# Altium PCB CartSimple.PCBDOC
Units mm, origin at the board's own origin, x right, y up, seen from the top; angles counter-clockwise.
Board outline 50 x 50 mm, 4 copper layers (Top Layer, Internal Plane 1, Internal Plane 2, Bottom Layer); 24 components, 25 nets, 103 pads, 0 vias.
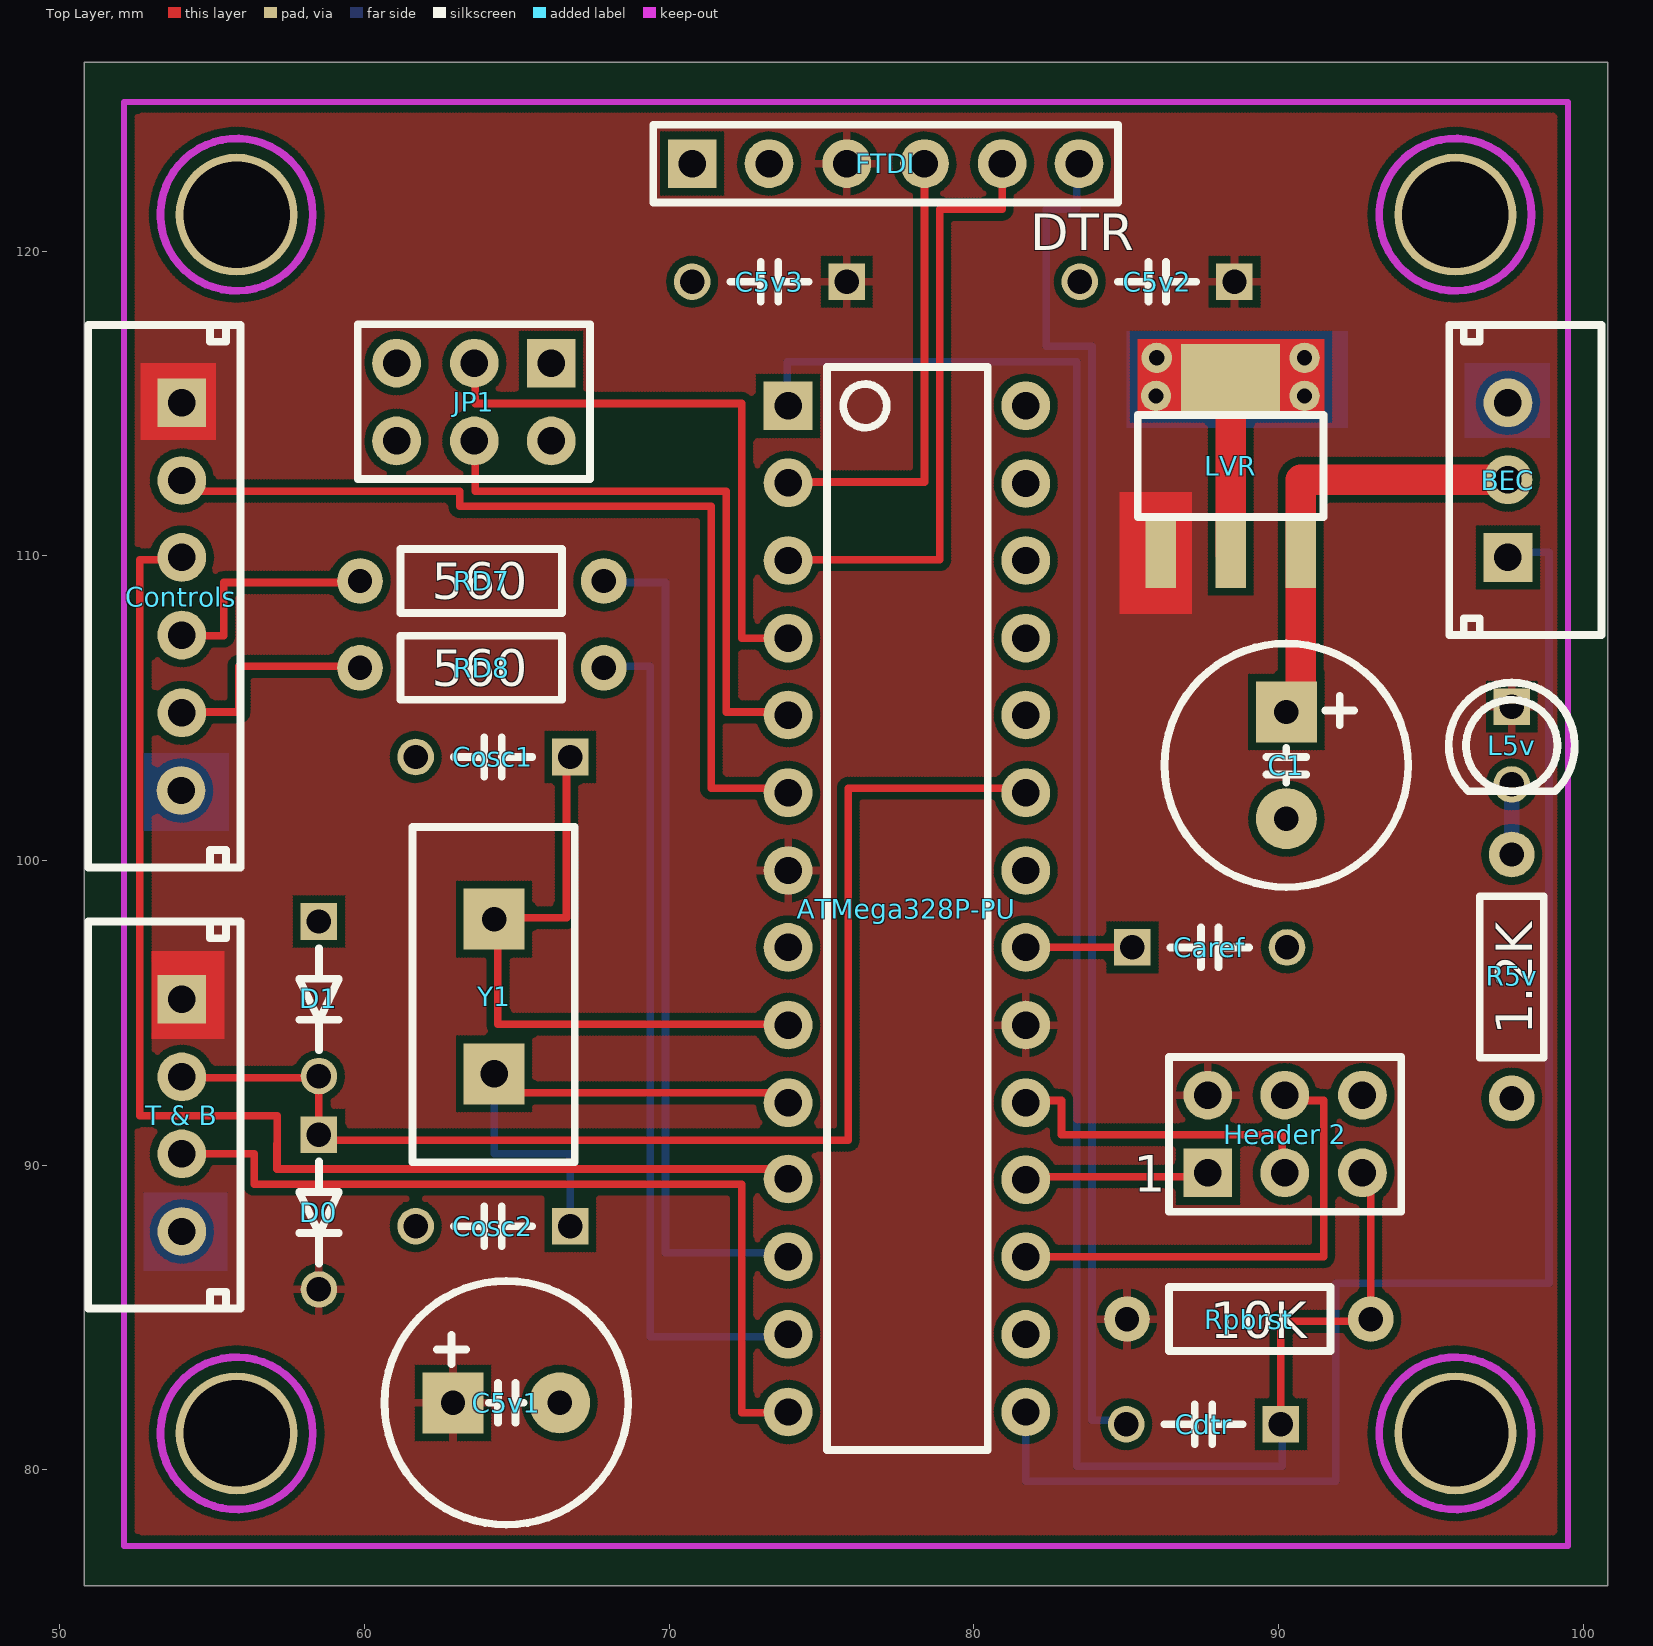
[diagram p0: Top Layer view]
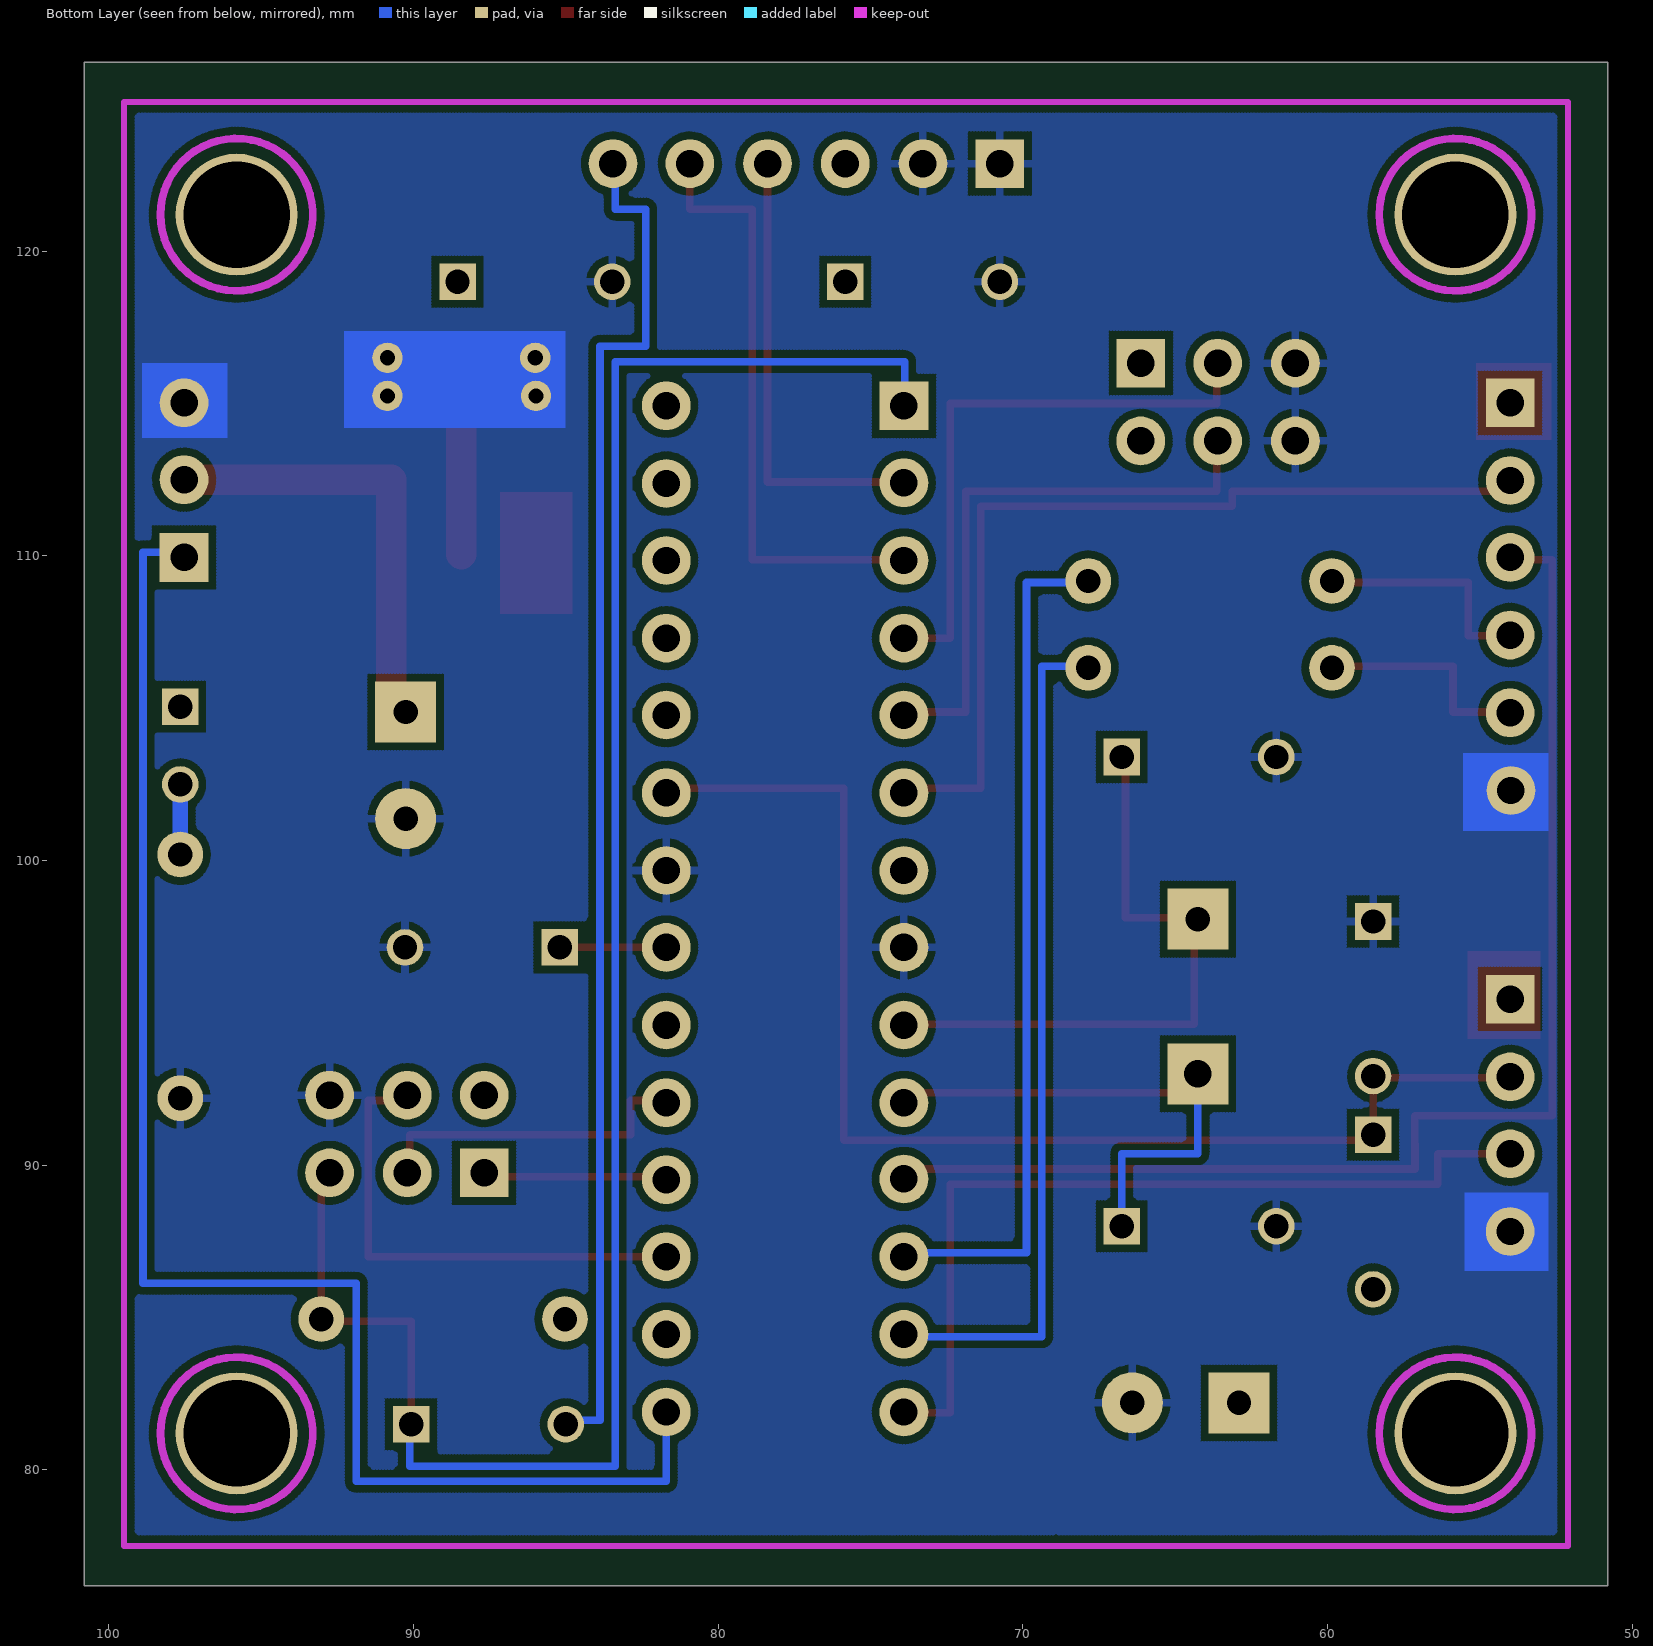
[diagram p1: Bottom Layer view, seen from below]
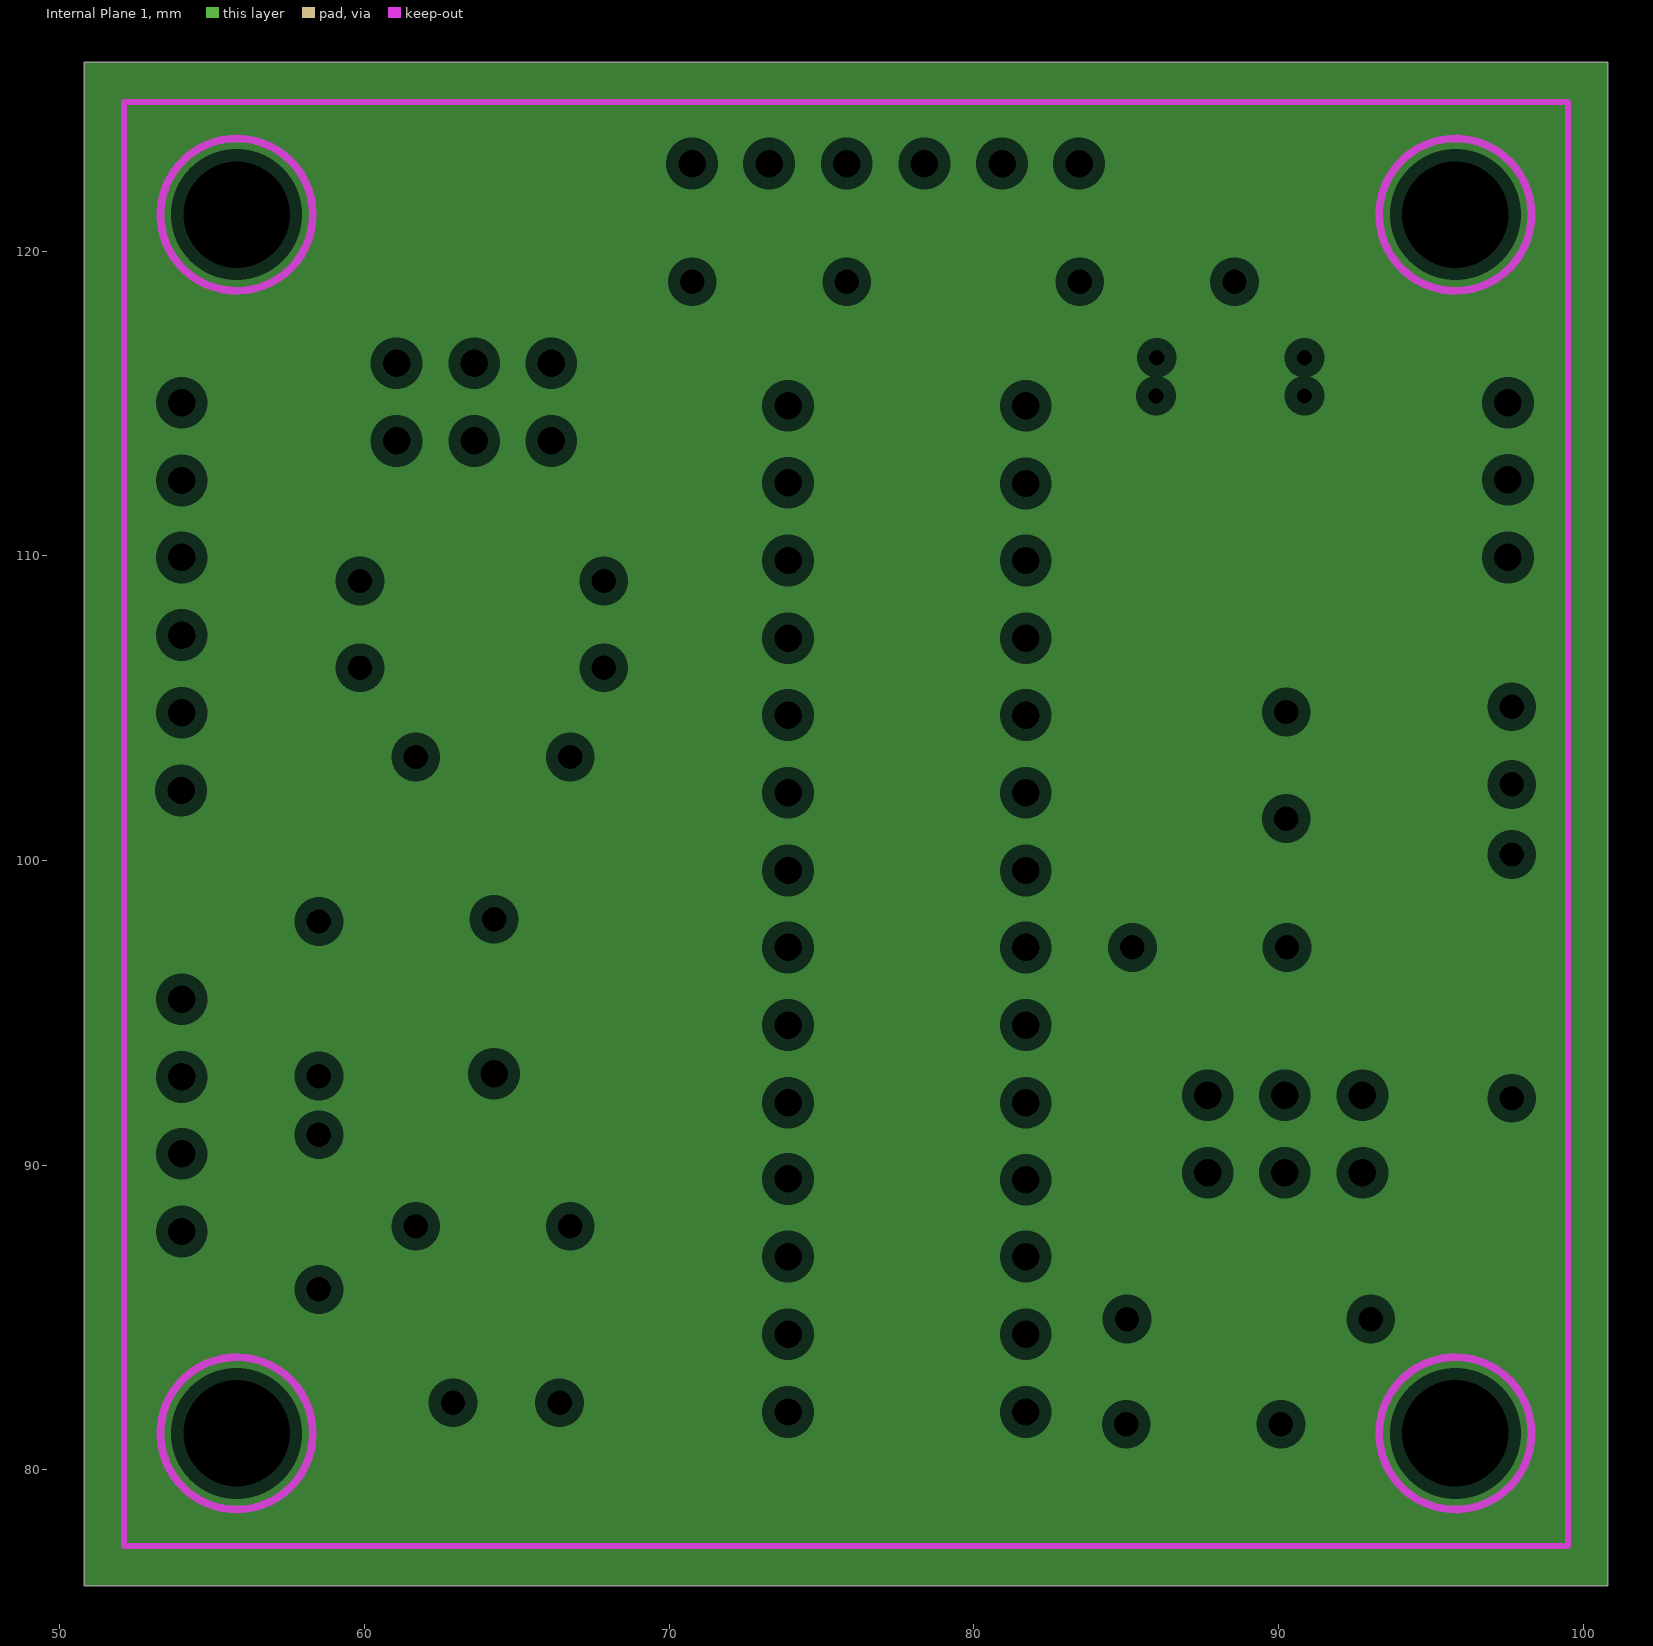
[diagram p2: Internal Plane 1, clearances drawn from the general rule]
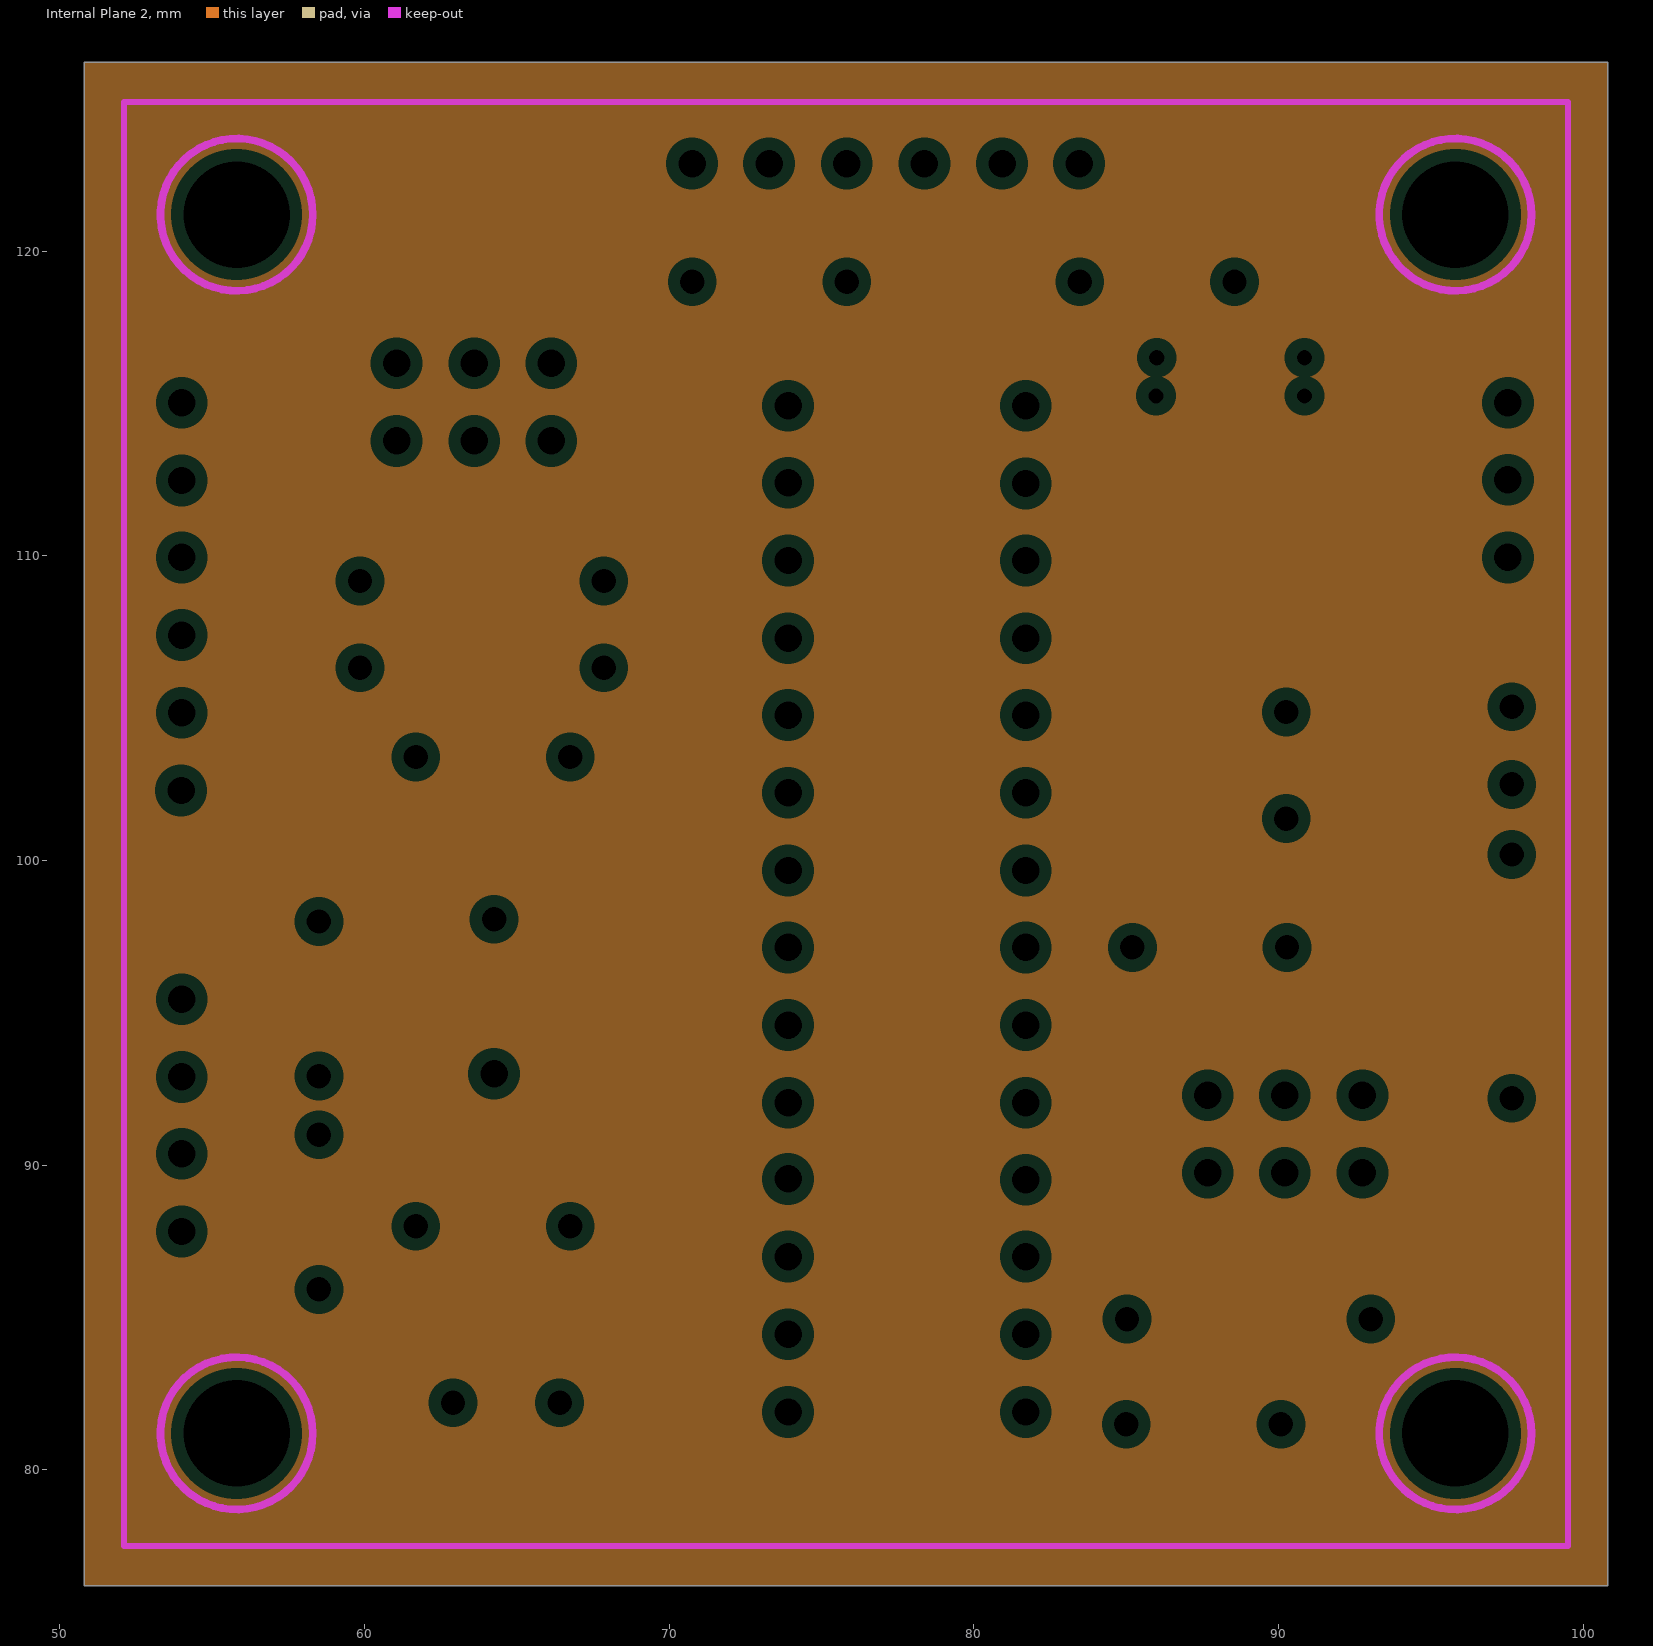
[diagram p3: Internal Plane 2, clearances drawn from the general rule]

## Layer stack, top to bottom
Top Layer: signal copper 0.0356
Dielectric: dielectric 0.32, FR-4, Dk 4.8
Internal Plane 1: plane copper 0.0356
Dielectric: dielectric 0.32, FR-4, Dk 4.8
Internal Plane 2: plane copper 0.0356
Dielectric: dielectric 0.32, FR-4, Dk 4.8
Bottom Layer: signal copper 0.0356

## Board outline
50.8,76.2 100.8,76.2 100.8,126.2 50.8,126.2

## Design rules (kind name [scope] priority, off if disabled: settings)
Clearance [All] p1: gap=0.25
ComponentClearance [All] p1: gap=0.254 collisioncheckmode=0
HoleSize [All] p1: absolutevalues=TRUE maxlimit=10 minlimit=0.3 maxpercent=80.000 minpercent=20.000
PlaneClearance [All] p1: clearance=0.4
PlaneConnect [All] p1: planeconnectstyle=Relief reliefexpansion=0.5 reliefentries=4 reliefconductorwidth=0.25 reliefairgap=0.25
PolygonConnect [All] p1: connectstyle=Relief reliefconductorwidth=0.25 reliefentries=4 polygonreliefangle="90 Angle"
RoomDefinition CartSimple [InComponentClass('CartSimple')] p1: confinementstyle=ConfineIn formatcopy=TRUE outline 34.35,8.65 216.009,8.65 216.009,48.177 34.35,48.177
RoutingLayers [All] p1: top layer=Horizontal bottom layer=Vertical
RoutingVias [All] p1: holewidth=0.3 width=1 viastyle="Through Hole" minholewidth=0.711 minwidth=1.27 maxholewidth=0.711 maxwidth=1.27
SolderMaskExpansion [All] p1: expansion=0.102
TestPointUsage [All] p1: valid=0 allowmultiple=FALSE
Testpoint [All] p1: side=15 testpointundercomponent=TRUE minsize=1.016 maxsize=2.54 preferedsize=1.524 minholesize=0 maxholesize=1.016 preferedholesize=0.813 testpointgrid=0.025 style=1023 order=1234567890
Width [All] p1: maxlimit=10 minlimit=0.25 preferedwidth=0.25
13 further rules are at their usual default settings.

## Components (designator, comment, footprint, x,y, rotation, side; value= is the part's Value field where it differs from the comment)
ATMega328P-PU "Atmel ATMega328" "DIP 28" 73.9,114.925 r0 top
BEC "Header 3" "Header 3way 2.54" 97.525,109.95 r180 top
C1 "Cap Pol1" "Electrolytic Capacitor 8mm" 90.253,105.653 r0 top
C5v1 "Cap Pol1" "Electrolytic Capacitor 8mm" 62.125,82.2 r90 top
C5v2 "Cap" "Capacitor 5mm" 88.55,119 r270 top
C5v3 "Cap" "Capacitor 5mm" 75.825,119 r270 top
Caref "Cap" "Capacitor 5mm" 85.2,97.15 r90 top
Cdtr "Cap" "Capacitor 5mm" 90.075,81.5 r270 top
Controls "Header 6" "Header 6way 2.54" 53.975,115 r0 top
Cosc1 "Cap" "Capacitor 5mm" 66.75,103.4 r270 top
Cosc2 "Cap" "Capacitor 5mm" 66.75,88 r270 top
D0 "Diode" "Signal Diode" 58.5,91 r0 top
D1 "Diode" "Signal Diode" 58.5,98 r0 top
FTDI "Header 6" "Header 6" 70.75,122.875 r90 top
"Header 2" "Header 3X2" "Header 2x3" 87.675,89.75 r90 top
JP1 "Header 3X2" "Header 2x3" 66.125,116.325 r270 top
L5v "LED0" "Led 3mm" 97.65,105.05 r0 top
LVR "Header 4" SOT-223 88.2,110.575 r0 top
R5v "Res1" "1/4W Resistor" 97.65,92.2 r90 top
RD7 "Res1" "1/4W Resistor" 59.85,109.175 r0 top
RD8 "Res1" "1/4W Resistor" 59.85,106.325 r0 top
Rpbrst "Res1" "1/4W Resistor" 93.025,84.95 r180 top
"T & B" "Header 4" "Header 4way 2.54" 53.425,95.45 r0 top
Y1 "16MHz XTAL" Crystal 64.225,98.075 r270 top

## Footprints (in the part's own frame and the unit in brackets; to place one, negate y for a bottom-side part, rotate by r counter-clockwise, add the part's x,y. Pads: shape width x height; smd on the part's side, far side on the other; paste and mask are expansions set on the pad)
"1/4W Resistor" [mm]
  round 1.5 hole 0.8: 1(0,0) 2(8,0)
  silkscreen extent 1.32,-1.05 6.62,1.05
"Capacitor 5mm" [mm]
  rect 1.2x1.2 hole 0.8: 1(0,0)
  round 1.2 hole 0.8: 2(0,-5.075)
  silkscreen extent -0.65,-3.82 0.65,-1.25
Crystal [mm]
  rect 2x2 hole 0.8: 1(0,0.025)
  rect 2x2 hole 0.9: 2(5.075,0.025)
  silkscreen extent -3.03,-2.65 7.98,2.67
"DIP 28" [mm]
  rect 1.6x1.6 hole 0.9: 1(0,0)
  round 1.6 hole 0.9: 2(0,-2.525) 3(0,-5.075) 4(0,-7.625) 5(0,-10.15) 6(0,-12.7) 7(0,-15.25) 8(0,-17.775) 9(0,-20.325) 10(0,-22.875) 11(0,-25.375) 12(0,-27.925) 13(0,-30.475) 14(0,-33.025) 15(7.8,-33.025) 16(7.8,-30.475) 17(7.8,-27.925) 18(7.8,-25.4) 19(7.8,-22.875) 20(7.8,-20.325) 21(7.8,-17.775) 22(7.8,-15.25) 23(7.8,-12.7) 24(7.8,-10.15) 25(7.8,-7.625) 26(7.8,-5.075) 27(7.8,-2.55) 28(7.8,0.004)
  silkscreen extent 1.28,-34.28 6.55,1.28
"Electrolytic Capacitor 8mm" [mm]
  rect 2x2 hole 0.8: 1(0,-0.775)
  round 2 hole 0.8: 2(0,-4.275)
  silkscreen extent -4,-6.52 4,1.48
"Header 2x3" [mm]
  rect 1.6x1.6 hole 0.9: 1(0,0)
  round 1.6 hole 0.9: 2(2.55,0) 3(0,-2.525) 4(2.55,-2.525) 5(0,-5.075) 6(2.55,-5.075)
  silkscreen extent -1.27,-6.35 3.8,1.28
"Header 3way 2.54" [mm]
  rect 1.6x1.6 hole 0.9: 1(0,0)
  round 1.6 hole 0.9: 2(0,-2.55) 3(0,-5.075)
  silkscreen extent -3.08,-7.63 1.92,2.55
"Header 4way 2.54" [mm]
  rect 1.6x1.6 hole 0.9: 1(0.575,0)
  round 1.6 hole 0.9: 2(0.575,-2.55) 3(0.575,-5.075) 4(0.575,-7.625)
  silkscreen extent -2.5,-10.15 2.5,2.55
"Header 6" [mm]
  rect 1.6x1.6 hole 0.9: 1(0,0)
  round 1.6 hole 0.9: 2(0,-2.525) 3(0,-5.075) 4(0,-7.625) 5(0,-10.175) 6(0,-12.7)
  silkscreen extent -1.27,-13.98 1.28,1.28
"Header 6way 2.54" [mm]
  rect 1.6x1.6 hole 0.9: 1(0.025,0.025)
  round 1.6 hole 0.9: 2(0.025,-2.525) 3(0.025,-5.05) 4(0.025,-7.6) 5(0.025,-10.15) 6(0,-12.7)
  silkscreen extent -3.05,-15.22 1.95,2.58
"Led 3mm" [mm]
  rect 1.2x1.2 hole 0.8: 1(0,0)
  round 1.2 hole 0.8: 2(0,-2.55)
  silkscreen extent -2.07,-2.78 2.07,0.79
"Signal Diode" [mm]
  rect 1.2x1.2 hole 0.8: 1(0,0)
  round 1.2 hole 0.8: 2(0,-5.075)
  silkscreen extent -0.65,-4.23 0.65,-0.88
SOT-223 [mm]
  rect 1x2.2 smd: 1(-2.075,-0.525) 2(0.225,-0.525) 3(2.525,-0.525)
  rect 3.25x2.2 smd: 4(0.225,5.275)
  silkscreen extent -2.83,0.7 3.28,4.05

## Part data
ATMega328P-PU: library part PIC16C55-10/SS, "EPROM-Based 8-Bit CMOS Microcontroller"
BEC: "Header, 3-Pin"
C1 C5v1: "Polarized Capacitor (Radial)"
C5v2 C5v3 Caref Cdtr Cosc1 Cosc2: "Capacitor"
Controls FTDI: "Header, 6-Pin"
D0 D1: "Default Diode"
"Header 2": "Header, 3-Pin, Dual row"
JP1: library part "Header 6H", "Header, 6-Pin,  Right Angle"
L5v: "Typical INFRARED GaAs LED"
LVR "T & B": "Header, 4-Pin"
R5v RD7 RD8 Rpbrst: "Resistor"
Y1: library part XTAL, "Crystal Oscillator"

## Free pads (board coordinates)
  round 4 hole 3.5: 0(55.8,81.2) 0(55.8,121.2) 0(95.8,81.2) 0(95.8,121.2)
  round 1 hole 0.5: 0(85.975,115.25) 0(86,116.5) 0(90.85,115.25) 0(90.85,116.5)

## Nets (pads, with @x,y where several pads share a name; then routed paths per layer and width w, separated by ;. In a path a pad name is that pad's centre, name@x,y a point inside that pad or via, vN(x,y) a via of type N, cw(c..) or ccw(c..) an arc to the next point about the centre after c; other vN are vias at no path point)
+5: "Header 2.2" "T & B.1" ATMega328P-PU.7 ATMega328P-PU.20 C5v1.1 C5v2.1 C5v3.1 Controls.1 D0.2 FTDI.3 L5v.1 LVR.1 Rpbrst.2
A0: "T & B.2" ATMega328P-PU.23 D0.1 D1.2 | length 40.8
  Top Layer w0.25: 54.275,92.875 D1.2@58.5,92.875 ; D0.1@58.5,90.825 75.875,90.825 75.875,102.375 ATMega328P-PU.23@81.575,102.375 ; D0.1@58.5,91 D1.2@58.5,92.925
AREF: ATMega328P-PU.21 Caref.1 | length 3.5
  Top Layer w0.25: ATMega328P-PU.21 Caref.1
D2/INT0: ATMega328P-PU.4 JP1.3 | length 19.3
  Top Layer w0.25: JP1.3@63.625,116.325 63.625,115 72.375,115 72.375,107.3 ATMega328P-PU.4
D3/INT1: ATMega328P-PU.5 JP1.4 | length 19.2
  Top Layer w0.25: JP1.4@63.625,113.775 63.625,112.125 71.875,112.125 71.875,104.875 ATMega328P-PU.5@73.9,104.875
D4/T0: ATMega328P-PU.6 Controls.2 | length 29.6
  Top Layer w0.25: Controls.2@54,112.125 63.125,112.125 63.125,111.625 71.375,111.625 71.375,102.375 ATMega328P-PU.6@73.9,102.375
D5/T1: ATMega328P-PU.11 Controls.3 | length 42.6
  Top Layer w0.25: Controls.3@54,109.875 52.625,109.875 52.625,91.625 57.129,91.619 57.125,89.875 ATMega328P-PU.11@73.9,89.875
D6: ATMega328P-PU.12 RD7.2 | length 27.9
  Bottom Layer w0.25: RD7.2@67.85,109.125 69.875,109.125 69.875,87.125 ATMega328P-PU.12@73.8,87.125
D7: ATMega328P-PU.13 RD8.2 | length 28
  Bottom Layer w0.25: RD8.2@67.85,106.375 69.375,106.375 69.375,84.375 ATMega328P-PU.13@73.9,84.375
D8/SS: "T & B.3" ATMega328P-PU.14 | length 28.4
  Top Layer w0.25: 54,90.375 56.375,90.375 56.375,89.375 72.375,89.375 72.375,81.875 ATMega328P-PU.14@73.9,81.875
D9/PWM: ATMega328P-PU.15 BEC.1 | length 50.9
  Bottom Layer w0.25: ATMega328P-PU.15 81.7,79.625 91.375,79.625 91.875,79.625 91.875,86.125 98.875,86.125 98.875,110.125 BEC.1@97.975,110.125
DTR: Cdtr.2 FTDI.6 | length 44.9
  Bottom Layer w0.25: FTDI.6@83.375,122.875 83.375,121.375 82.375,121.375 82.375,116.875 83.875,116.875 83.875,81.625 Cdtr.2@85,81.625
GND: "Header 2.6" "T & B.4" ATMega328P-PU.8 ATMega328P-PU.22 BEC.3 C1.2 C5v1.2 C5v2.2 C5v3.2 Caref.2 Controls.6 Cosc1.2 Cosc2.2 D1.1 FTDI.1 FTDI.2 JP1.5 JP1.6 LVR.2 LVR.4 pad.0@85.975,115.25 pad.0@86,116.5 pad.0@90.85,115.25 pad.0@90.85,116.5 R5v.1 | length 5.8
  Top Layer w1: LVR.2 LVR.4@88.425,115.825
MISO: "Header 2.1" ATMega328P-PU.18 | length 5.5
  Top Layer w0.25: ATMega328P-PU.18@81.7,89.625 87.225,89.625
MOSI: "Header 2.4" ATMega328P-PU.17 | length 16.2
  Top Layer w0.25: ATMega328P-PU.17 91.475,87 91.475,92.125 90.15,92.125
NetATMega328P-PU_9: ATMega328P-PU.9 Cosc1.1 Y1.1 | length 20.5
  Top Layer w0.25: Y1.1@64.3,98.125 66.625,98.125 Cosc1.1@66.625,103.4 ; Y1.1@64.375,98.05 64.375,94.625 ATMega328P-PU.9@73.9,94.625
NetATMega328P-PU_10: ATMega328P-PU.10 Cosc2.1 Y1.2 | length 17
  Top Layer w0.25: Y1.2@64.25,92.375 ATMega328P-PU.10@73.75,92.375
  Bottom Layer w0.25: Y1.2 64.25,90.375 66.75,90.375 Cosc2.1
NetControls_4: Controls.4 RD7.1 | length 7.6
  Top Layer w0.25: Controls.4@54,107.375 55.375,107.375 55.375,109.125 RD7.1@59.85,109.125
NetControls_5: Controls.5 RD8.1 | length 7.2
  Top Layer w0.25: Controls.5@54.175,104.875 55.875,104.875 55.875,106.375 RD8.1@59.85,106.375
NetL5v_2: L5v.2 R5v.2 | length 2.3
  Bottom Layer w0.5: R5v.2 L5v.2
RESET: "Header 2.5" ATMega328P-PU.1 Cdtr.1 Rpbrst.1 | length 66.5
  Top Layer w0.25: Cdtr.1 90.075,84.875 Rpbrst.1@93.075,84.875 ; Rpbrst.1 93.025,89.725
  Bottom Layer w0.25: ATMega328P-PU.1@73.875,114.875 73.875,116.375 83.375,116.375 83.375,80.125 90.125,80.125 Cdtr.1@90.125,81.5
RXD: ATMega328P-PU.2 FTDI.4 | length 14.9
  Top Layer w0.25: ATMega328P-PU.2@73.925,112.425 78.375,112.425 FTDI.4
SCK: "Header 2.3" ATMega328P-PU.19 | length 10.8
  Top Layer w0.25: ATMega328P-PU.19@81.7,92.125 82.875,92.125 82.875,91 90.125,91 90.125,89.75
TXD: ATMega328P-PU.3 FTDI.5 | length 20
  Top Layer w0.25: ATMega328P-PU.3@73.95,109.875 78.875,109.875 78.875,121.375 80.925,121.375 FTDI.5
VCC: BEC.2 C1.1 LVR.3 | length 14.3
  Top Layer w0.25: LVR.3@90.725,110.033 LVR.3
  Top Layer w1: C1.1@90.725,105.025 LVR.3@90.725,110.033 ; LVR.3@90.725,110.025 90.725,112.5 BEC.2
pads on no net: ATMega328P-PU.16 ATMega328P-PU.24 ATMega328P-PU.25 ATMega328P-PU.26 ATMega328P-PU.27 ATMega328P-PU.28 JP1.1 JP1.2

## Polygon pours and split planes (outlines as drawn)
+5 on Top Layer (hatched 90Degree grid 0.1 track 0.2, remove dead copper): 51.375,125.3 100.05,125.3 100.05,77.275 51.55,77.275
GND on Bottom Layer (hatched 90Degree grid 0.1 track 0.2, remove dead copper): 51.75,125.375 100.15,125.375 100.15,77.075 51.525,77.075

## Keep-outs
Keep-Out Layer:
  circle w0.254: c95.8,121.2 r2.5
  circle w0.254: c95.8,81.2 r2.5
  circle w0.254: c55.8,121.2 r2.5
  circle w0.254: c55.8,81.2 r2.5
  lines w0.2: 52.1,77.5 52.1,124.9 99.5,124.9 99.5,77.5 52.1,77.5

## Other copper
Top Layer:
  rectangle net +5: 53,94.15 55.4,97.025
  rectangle net +5: 52.65,113.8 55.125,116.325
  rectangle net +5: 84.775,108.1 87.15,112.1
  rectangle net GND: 85.375,114.625 91.5,117.125
Bottom Layer:
  rectangle net GND: 85,114.2 92.275,117.375
  rectangle net GND: 96.1,113.875 98.9,116.325
  rectangle net GND: 52.75,86.525 55.5,89.1
  rectangle net GND: 52.75,100.975 55.55,103.525

## Silkscreen, mask and mechanical layers (free items; w line width, h text height)
Top Overlay:
  text "DTR" at 81.85,120.025 h1.2
  text "560" at 62.2,108.575 h1.2
  text "560" at 62.2,105.725 h1.2
  text "1.2K" at 98.325,94.275 h1.2 r90
  text "1" at 85.25,89.125 h1.2
  text "10K" at 87.75,84.325 h1.2